# Altium PCB main_board.PcbDoc
Units mm, origin at the board's own origin, x right, y up, seen from the top; angles counter-clockwise.
Board outline 60 x 40 mm, 2 copper layers (Top Layer, Bottom Layer); 62 components, 50 nets, 234 pads, 46 vias.
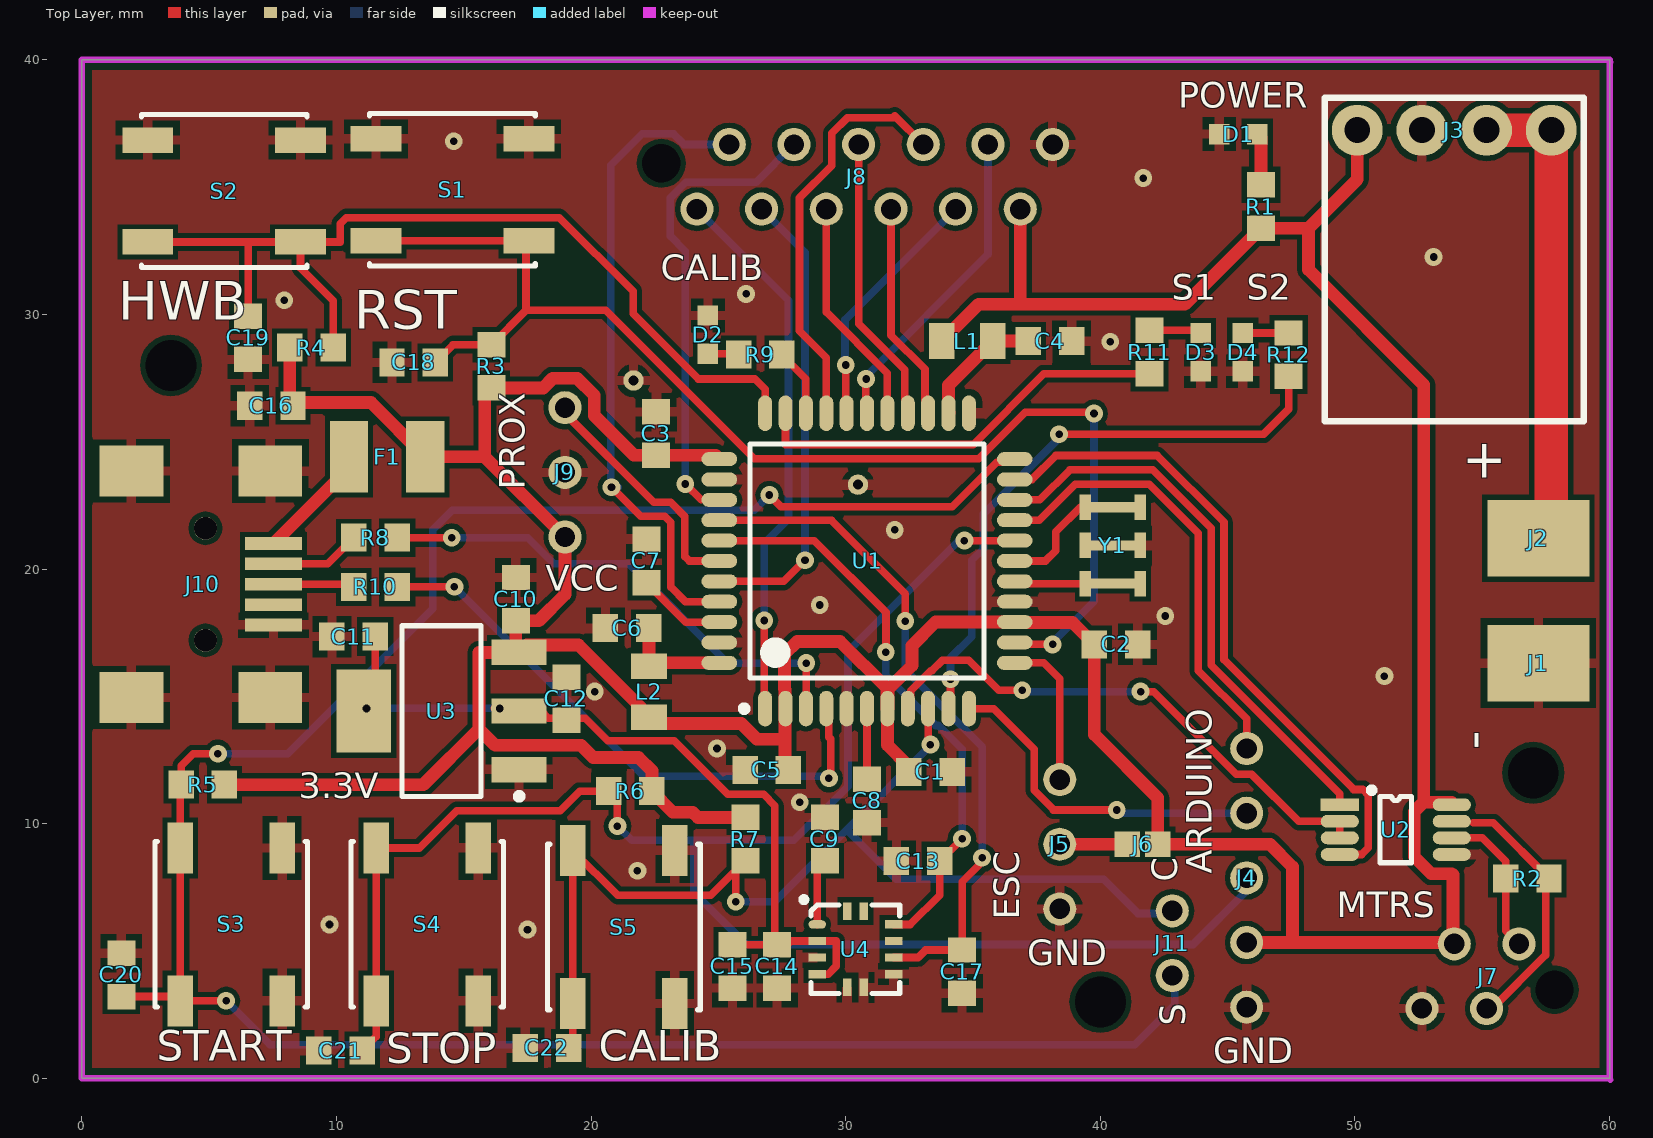
[diagram p0: Top Layer view]
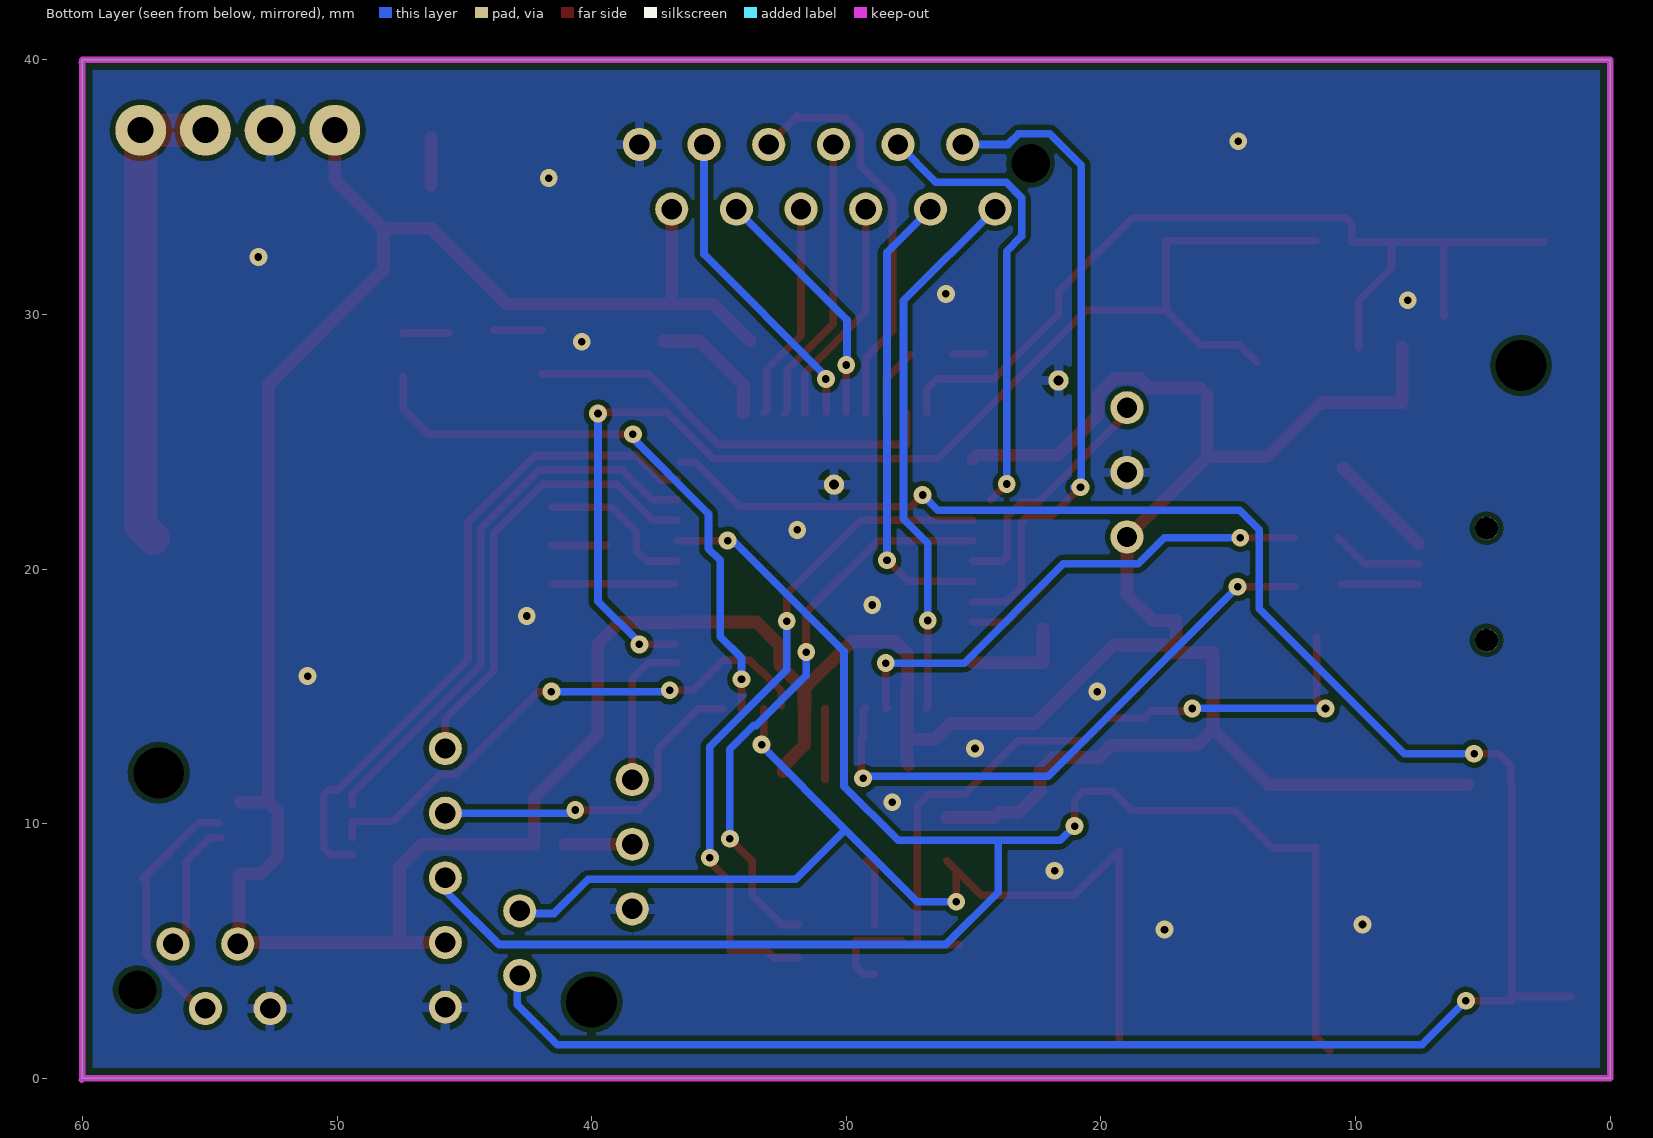
[diagram p1: Bottom Layer view, seen from below]
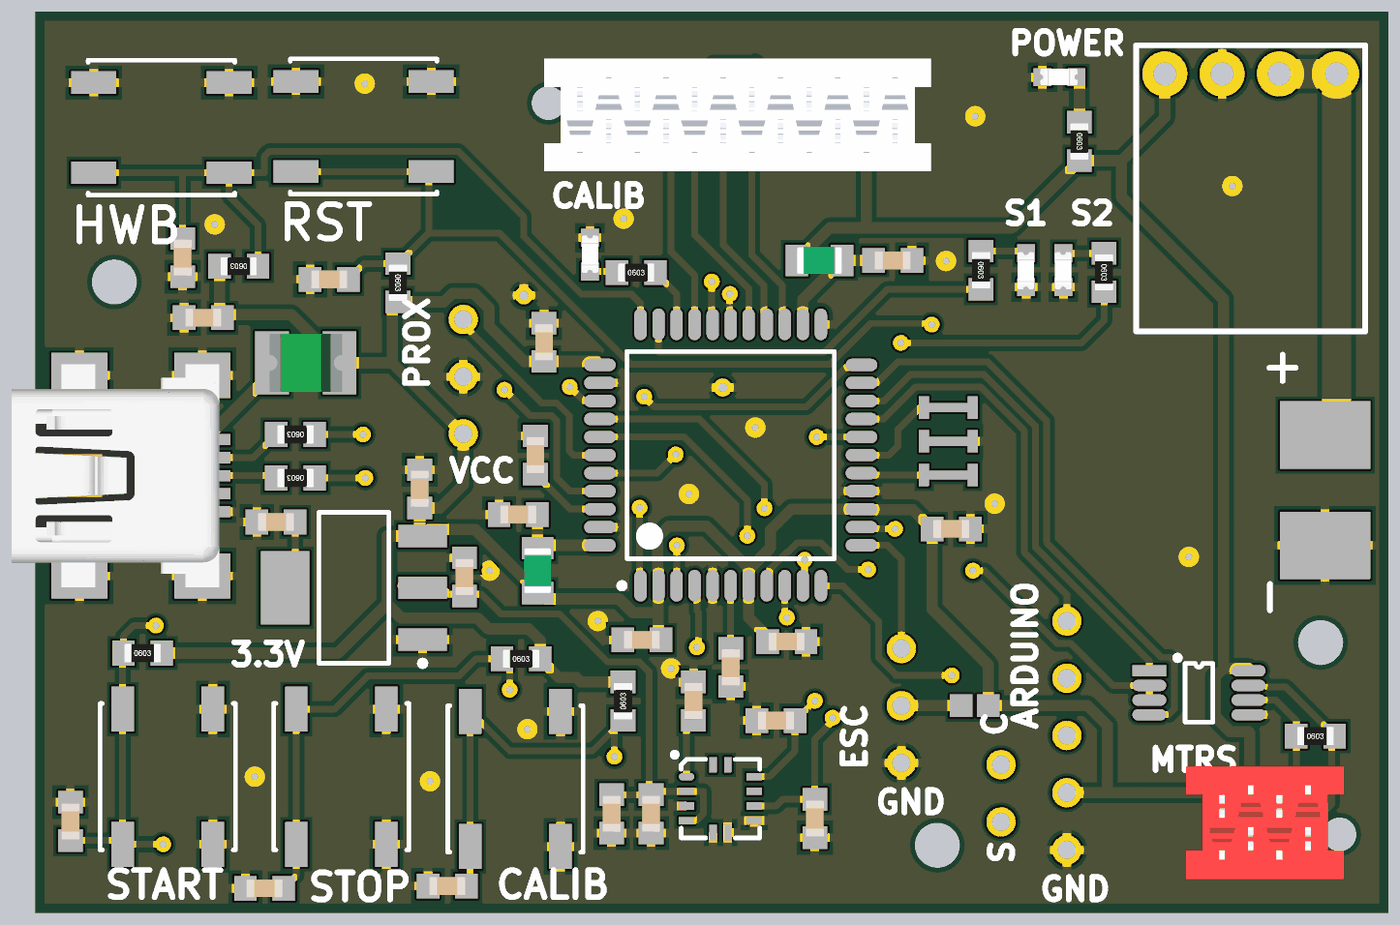
[diagram p2: 3D render of the assembled board from above, using the file's embedded part models]

## Layer stack, top to bottom
Top Solder: solder mask 0.0102, Solder Resist, Dk 3.5
Top Layer: signal copper 0.0356
Dielectric1: dielectric 0.32, FR-4, Dk 4.8
Bottom Layer: signal copper 0.0356
Bottom Solder: solder mask 0.0102, Solder Resist, Dk 3.5

## Board outline
0,0 0,40 60,40 60,0

## Design rules (kind name [scope] priority, off if disabled: settings)
AssemblyTestPointUsage SilkToBoardRegionClearance_1 [All] p2:
AssemblyTestPointUsage SilkToBoardRegionClearance_2 [All] p3:
BoardOutlineClearance "Board outline clearance" [InNet('GND')] p1: gap=0.4
Clearance [All] p1: gap=0.203
HoleSize [All] p1: absolutevalues=TRUE maxlimit=6.35 minlimit=0.3 maxpercent=80.000 minpercent=20.000
MatchedLengths DiffPair_DIFF100MatchedLengths [InDifferentialPairClass('DIFF100')] p1: tolerance=0.152 checknetsindiffpair=TRUE checkdiffpairvsdiffpair=FALSE checkxsignals=FALSE checkothers=FALSE
MinimumSolderMaskSliver [All] p1: minsoldermaskwidth=0.1
MinimumSolderMaskSliver SilkscreenOverComponentPads_2 [All] p2: minsoldermaskwidth=0.254
MinimumSolderMaskSliver SilkToSolderMaskClearance_1 [IsPad] p3: minsoldermaskwidth=0.254
MinimumSolderMaskSliver SilkscreenOverComponentPads_1 [All] p4: minsoldermaskwidth=0.254
MinimumSolderMaskSliver SilkToSolderMaskClearance [IsPad] p5: minsoldermaskwidth=0.254
MinimumSolderMaskSliver SilkscreenOverComponentPads [All] p6: minsoldermaskwidth=0.254
PolygonConnect via [isvia] p1: connectstyle=Direct reliefconductorwidth=0.254 reliefentries=4 polygonreliefangle="90 Angle" airgapwidth=0.254
PolygonConnect [All] p2: connectstyle=Relief reliefconductorwidth=0.381 reliefentries=4 polygonreliefangle="90 Angle" airgapwidth=0.254
RoutingVias [All] p1: holewidth=0.305 width=0.635 viastyle="Through Hole" minholewidth=0.305 minwidth=0.635 maxholewidth=0.711 maxwidth=1.27
SilkToSolderMaskClearance SilkToSolderMaskClearance_2 [IsPad] p1: minsilkscreentomaskgap=0.254 clearancetoexposedcopper=TRUE
SolderMaskExpansion [All] p1: expansion=0.102
Width [All] p1: maxlimit=2.54 minlimit=0.152 preferedwidth=0.254
27 further rules are at their usual default settings.

## Components (designator, comment, footprint, x,y, rotation, side; value= is the part's Value field where it differs from the comment)
C1 "100 nF *V" C0603 33.325,12.04 r180 top
C2 "100 nF *V" C0603 40.615,17.043 r180 top
C3 "100 nF *V" C0603 22.555,25.324 r270 top
C4 "100 nF *V" C0603 38.024,28.956 r180 top
C5 "100 nF *V" C0603 26.899,12.116 r180 top
C6 "100 nF *V" C0603 21.412,17.678 r0 top
C7 "100 nF *V" C0603 22.174,20.32 r90 top
C8 "1 uF *V" C0603 30.836,10.897 r270 top
C9 "100 nF *V" C0603 29.185,9.398 r90 top
C10 "100 nF *V" C0603 17.043,18.821 r270 top
C11 "100 nF *V" C0603 10.668,17.348 r180 top
C12 "100 nF *V" C0603 19.025,14.91 r90 top
C13 "9.1 nF *V" C0603 32.842,8.534 r180 top
C14 "4.7 uF *V" C0603 27.305,4.394 r90 top
C15 "100 nF *V" C0603 25.552,4.394 r90 top
C16 "100 nF *V" C0603 7.442,26.416 r0 top
C17 "9.1 nF *V" C0603 34.569,4.191 r270 top
C18 "100 nF *V" C0603 13.03,28.118 r180 top
C19 "100 nF *V" C0603 6.528,29.083 r270 top
C20 "100 nF *V" C0603 1.549,4.064 r90 top
C21 "100 nF *V" C0603 10.16,1.092 r180 top
C22 "100 nF *V" C0603 18.263,1.194 r180 top
D1 "LED" LED_0603 45.415,37.084 r180 top
D2 "LED" LED_0603 24.587,29.21 r90 top
D3 "LED" LED_0603 43.942,28.524 r270 top
D4 "LED" LED_0603 45.593,28.524 r270 top
F1 "#NAME?" F1210 11.989,24.409 r0 top
J1 "GND" POWER-PAD-4x3 57.201,16.307 r0 top
J2 "Vin" POWER-PAD-4x3 57.201,21.209 r0 top
J3 "Pololu 5V regu" "Pin Header 4" 53.899,37.236 r180 top
J4 "HEADER-5" PIN-HEADER-5 45.745,12.954 r270 top
J5 "HEADER-3" PIN-HEADER-3 38.405,11.735 r270 top
J6 "JUMPER" JUMPER-SMD-1010 41.656,9.195 r180 top
J7 "HEADER-4" MICRO-MATCH-4 56.439,5.283 r0 top
J8 "HEADER-12" MICRO-MATCH-12 24.155,34.138 r180 top
J9 "HEADER-3" PIN-HEADER-3 18.974,21.26 r90 top
J10 "USB-MINI-B" USB-B-MINI 4.851,19.406 r270 top
J11 "HEADER-2" PIN-HEADER-2 42.824,6.579 r270 top
L1 "Inductor" L0805 34.773,28.956 r0 top
L2 "Inductor" L0805 22.276,15.189 r90 top
R1 "330R" R0603 46.304,34.239 r270 top
R2 "120R" R0603 56.769,7.849 r0 top
R3 "10k" R0603 16.078,27.965 r270 top
R4 "10k" R0603 9.017,28.702 r180 top
R5 "10k" R0603 4.75,11.532 r0 top
R6 "10k" R0603 21.539,11.278 r0 top
R7 "10k" R0603 26.06,9.398 r90 top
R8 "22R" R0603 11.532,21.234 r180 top
R9 "330R" R0603 26.645,28.423 r0 top
R10 "22R" R0603 11.532,19.304 r180 top
R11 "330R" R0603 41.935,28.524 r270 top
R12 "330R" R0603 47.396,28.423 r270 top
S1 "EVQQ" EVQQ 14.554,34.9 r180 top
S2 "EVQQ" EVQQ 5.588,34.849 r180 top
S3 "EVQQ" EVQQ 5.867,6.045 r90 top
S4 "EVQQ" EVQQ 13.564,6.045 r90 top
S5 "EVQQ" EVQQ 21.285,5.944 r90 top
U1 "ATmega32U4-AU" TQFP-44_10X10 30.836,20.32 r90 top
U2 "RS-485" RS-485 49.403,10.744 r0 top
U3 "REG1117" SOT-223 14.122,14.427 r180 top
U4 "Accelerometer" Accel 28.88,6.045 r0 top
Y1 "Resonator" "Ceramic Resonator" 40.488,20.93 r270 top

## Footprints (in the part's own frame and the unit in brackets; to place one, negate y for a bottom-side part, rotate by r counter-clockwise, add the part's x,y. Pads: shape width x height; smd on the part's side, far side on the other; paste and mask are expansions set on the pad)
Accel [mm]
  oval 0.686x0.33 smd: 1(0,0)
  rect 0.686x0.33 smd: 2(0,-0.65) 3(0,-1.3) 4(0,-1.95) 7(3,-1.95) 8(3,-1.3) 9(3,-0.65) 10(3,0)
  rect 0.33x0.686 smd: 5(1.175,-2.475) 6(1.825,-2.475) 11(1.825,0.525) 12(1.175,0.525)
  silkscreen extent -0.61,-2.72 3.24,1.07
C0603 [mm] "0603 ceramic capacitor"
  rect 1x1.1 smd: 1(-0.85,0) 2(0.85,0)
  body extent -0.8,-0.4 0.8,0.4, height 0.8
"Ceramic Resonator" [mm]
  rect 1x0.45 smd: 0(0,1.075) 0(0,-1.075) 1(-1.5,1.075) 1(-1.5,-1.075) 2(1.5,1.075) 2(1.5,-1.075)
  rect 0.4x1.7 smd: 0(0,0) 1(-1.5,0) 2(1.5,0)
EVQQ [mm] "Switch, 2-Leads, Body 6,50x6,00mm, Panasonic EVQQ/EVQP"
  rect 2x1 smd: 1(-3,2) 1(3,2) 2(-3,-2) 2(3,-2)
  silkscreen extent -3.25,-3 3.25,3, body extent -3.25,-3 3.25,3, height 3
F1210 [mm]
  rect 1.5x2.8 smd: 1(-1.5,0) 2(1.5,0)
  body extent -1.61,-1.29 1.61,1.29, height 0.67
JUMPER-SMD-1010 [mm]
  rect 1x1 smd: 1(-0.6,0) 2(0.6,0)
L0805 [mm] "0805 inductor"
  rect 1x1.4 smd: 1(-1,0) 2(1,0)
  body extent -1,-0.6 1,0.6, height 0.94
LED_0603 [mm]
  rect 0.8x0.8 smd: 1(-0.75,0) 2(0.75,0)
  body extent -0.8,-0.38 0.85,0.35, height 0.68
MICRO-MATCH-4 [mm]
  round 1.3 hole 0.8: 1(0,0) 2(-1.27,-2.54) 3(-2.54,0) 4(-3.81,-2.54)
  round 0 hole 1.5 unplated: drill(1.4,-1.8)
  body extent -5.41,-3.77 1.6,1.23, height 4
MICRO-MATCH-12 [mm]
  round 1.3 hole 0.8: 1(0,0) 2(-1.27,-2.54) 3(-2.54,0) 4(-3.81,-2.54) 5(-5.08,0) 6(-6.35,-2.54) 7(-7.62,0) 8(-8.89,-2.54) 9(-10.16,0) 10(-11.43,-2.54) 11(-12.7,0) 12(-13.97,-2.54)
  round 0 hole 1.5 unplated: drill(1.4,-1.8)
  body extent -15.57,-3.77 1.6,1.23, height 4
"Pin Header 4" [mm] "4-pin pin header"
  round 2 hole 1.02: 1(-3.81,0) 2(-1.27,0) 3(1.27,0) 4(3.81,0)
  silkscreen extent -5.08,-1.27 5.08,11.43
PIN-HEADER-2 [mm]
  round 1.3 hole 0.8: 1(0,0) 2(2.54,0)
PIN-HEADER-3 [mm]
  round 1.3 hole 0.8: 1(0,0) 2(2.54,0) 3(5.08,0)
PIN-HEADER-5 [mm]
  round 1.3 hole 0.8: 1(0,0) 2(2.54,0) 3(5.08,0) 4(7.62,0) 5(10.16,0)
POWER-PAD-4x3 [mm]
  rect 4x3 smd: 1(0,0)
R0603 [mm] "0603 resistor"
  rect 1x1.1 smd: 1(-0.85,0) 2(0.85,0)
  body extent -0.8,-0.4 0.8,0.4, height 0.45
RS-485 [mm]
  rect 1.5x0.5 smd: 1(0,0)
  oval 1.5x0.5 smd: 2(0,-0.65) 3(0,-1.3) 4(0,-1.95) 5(4.4,-1.95) 6(4.4,-1.3) 7(4.4,-0.65) 8(4.4,0)
  silkscreen extent 1.15,-2.28 2.82,0.68
SOT-223 [mm] "SOT223, 4-Leads, Body 6,50x7,00mm (avg), Pitch 2,30mm"
  rect 2.15x1 smd: 1(-3.05,2.3) 2(-3.05,0) 3(-3.05,-2.3)
  rect 2.15x3.25 smd: 4(3.05,0)
  silkscreen extent -3.18,-3.35 1.55,3.47, body extent -1.85,-3.35 1.85,3.35, height 1.8
TQFP-44_10X10 [mm] "TQFP, 44-Leads, Body 10,00x10,00mm, Pitch 0,80mm"
  oval 1.4x0.55 smd: 1(-5.8,4) 2(-5.8,3.2) 3(-5.8,2.4) 4(-5.8,1.6) 5(-5.8,0.8) 6(-5.8,0) 7(-5.8,-0.8) 8(-5.8,-1.6) 9(-5.8,-2.4) 10(-5.8,-3.2) 11(-5.8,-4) 23(5.8,-4) 24(5.8,-3.2) 25(5.8,-2.4) 26(5.8,-1.6) 27(5.8,-0.8) 28(5.8,0) 29(5.8,0.8) 30(5.8,1.6) 31(5.8,2.4) 32(5.8,3.2) 33(5.8,4)
  oval 0.55x1.4 smd: 12(-4,-5.8) 13(-3.2,-5.8) 14(-2.4,-5.8) 15(-1.6,-5.8) 16(-0.8,-5.8) 17(0,-5.8) 18(0.8,-5.8) 19(1.6,-5.8) 20(2.4,-5.8) 21(3.2,-5.8) 22(4,-5.8) 34(4,5.8) 35(3.2,5.8) 36(2.4,5.8) 37(1.6,5.8) 38(0.8,5.8) 39(0,5.8) 40(-0.8,5.8) 41(-1.6,5.8) 42(-2.4,5.8) 43(-3.2,5.8) 44(-4,5.8)
  silkscreen extent -5.92,-4.6 4.6,4.95, body extent -5,-5 5,5, height 1.2
USB-B-MINI [mm]
  round 0.9 hole 0.9 unplated: 0(-2.2,0) 0(2.2,0)
  rect 0.5x2.25 smd: 1(-1.6,2.675) 2(-0.8,2.675) 3(0,2.675) 4(0.8,2.675) 5(1.6,2.675)
  rect 2x2.5 smd: 6(-4.45,2.55) 7(4.45,2.55) 8(4.45,-2.9) 9(-4.45,-2.9)
  body extent -4.95,-5.9 4.95,3.3, height 4.15

## Part data
C1 C2 C3 C4 C5 C6 C7 C8 C9 C10 C11 C12 C13 C14 C15 C16 C17 C18 C19 C20 C21 C22: library part Capacitor, "Ceramic capacitor"
D1 D2 D3 D4: "Light Emitting Diode"
F1: library part Fuse, "Fuse"
J1 J2: library part HEADER-1
J3: library part "Pin header 4"
J6: library part JUMPER-SMD
J10: library part USB-B-MINI
R1 R2 R3 R4 R5 R6 R7 R8 R9 R10 R11 R12: library part Resistor, "Resistor"
S1 S2 S3 S4 S5: "Switch"
U1: library part ATMEGA32U4-AU, "8-bit AVR Microcontroller, 2.7-5.5V, 32KB Flash, 2.5KB EEPROM, 1KB SRAM, USB Controller, 44-pin TQFP, Industrial Grade (-40°C to 85°C)"

## Free pads (board coordinates)
  round 1 hole 2 unplated: 15(3.5,28) 16(40,3) 17(57,12)
  round 0.8 hole 0.4: 20(21.666,27.407) 21(30.48,23.317)

## Via types
v1: diameter 0.7, hole 0.3, Top Layer to Bottom Layer, 42 vias
v2: diameter 0.7, hole 0.305, Top Layer to Bottom Layer, 4 vias

## Nets (pads, with @x,y where several pads share a name; then routed paths per layer and width w, separated by ;. In a path a pad name is that pad's centre, name@x,y a point inside that pad or via, vN(x,y) a via of type N, cw(c..) or ccw(c..) an arc to the next point about the centre after c; other vN are vias at no path point)
GND: C1.1 C2.1 C3.1 C4.1 C5.2 C6.1 C7.2 C8.2 C9.2 C10.1 C11.2 C12.2 C13.2 C14.1 C15.1 C16.1 C17.2 C18.2 C19.2 C20.2 C21.2 C22.2 D1.2 D2.2 D3.2 D4.2 J1.1 J3.3 J4.5 J5.3 J7.4 J8.12 J9.2 J10.5 J10.6 J10.7 J10.8 J10.9 pad.20 pad.21 S1.2 S2.2 S3.2 S4.2 S5.2 U1.5 U1.15 U1.23 U1.35 U1.43 U2.5 U3.1 U4.3 U4.5 U4.6 U4.7 Y1.0 | length 2.1
  Top Layer w0.3: Y1.0@39.413,20.93 Y1.0@41.563,20.93
  other v1: 17.501,5.842 9.728,6.045 21.819,8.153 28.194,10.846 24.943,12.954 20.142,15.189 51.156,15.799 42.545,18.161 28.981,18.593 31.928,21.539 40.386,28.931 7.95,30.556 26.086,30.81 53.086,32.258 41.681,35.357 14.605,36.805
NetC4_2: C4.2 L1.2 U1.24 | length 5
  Top Layer w0.5: U1.24@34.057,26.141 U1.24 34.036,27.219 L1.2 C4.2
NetC6_2: C6.2 L2.2 U1.44 | length 4.1
  Top Layer w0.5: C6.2@22.276,17.665 22.276,16.32 U1.44
NetC7_1: C7.1 U1.42 | length 3.5
  Top Layer w0.3: C7.1 23.724,17.92 U1.42
NetC8_1: C8.1 U1.6 | length 2.8
  Top Layer w0.3: C8.1 U1.6
NetC9_1: C9.1 U4.1 | length 2.6
  Top Layer w0.3: U4.1 28.88,8.243 C9.1
NetC11_1: C11.1 C12.1 C14.2 C15.2 U3.2 U3.4 U4.2 U4.4 | length 32.4
  Top Layer w0.3: v2(11.176,14.529) 11.176,14.531 11.518,14.873 C11.1 ; v2(16.408,14.529) 16.197,14.529 16.298,14.427 U3.2 18.034,14.427 18.313,14.148 19.761,14.148 20.65,13.259 23.259,13.259 25.366,11.152 26.778,11.152 27.217,10.713 27.217,5.244 C15.2 ; C14.2 27.698,5.244 27.849,5.395 U4.2 29.627,5.395 29.627,4.413 29.309,4.095 U4.4
  Bottom Layer w0.3: v2(11.176,14.529) v2(16.408,14.529)
NetC13_1: C13.1 U1.38 U4.10 | length 22.8
  Top Layer w0.3: U1.38 28.766,21.12 31.58,18.305 31.58,16.747 v1(31.572,16.739) ; U4.10 32.537,6.045 33.692,7.2 C13.1 v1(34.569,9.412)
  Bottom Layer w0.3: v1(31.572,16.739) 31.572,15.824 33.536,13.86 33.637,13.86 34.569,12.928 v1(34.569,9.412)
NetC17_1: C17.1 U1.37 U4.8 | length 26.9
  Top Layer w0.3: U1.37 29.439,21.92 32.334,19.025 v1(32.334,17.958) ; U4.8 32.838,4.745 33.133,5.041 C17.1 34.569,7.722 35.433,8.585 v1(35.357,8.661)
  Bottom Layer w0.3: v1(32.334,17.958) 32.334,16.053 35.357,13.03 v1(35.357,8.661)
NetC18_1: C18.1 R3.1 S1.1 U1.13 | length 49.6
  Top Layer w0.3: S1.1@11.554,32.9 S1.1@17.453,32.9 ; C18.1 14.578,28.815 R3.1 16.09,28.815 17.443,30.169 ; S1.1@17.443,32.789 17.443,30.169 ; U1.13@36.712,17.043 v1(38.125,17.043) ; v1(39.751,26.111) 39.751,26.162 37.055,26.162 35.23,24.338 26.403,24.338 20.572,30.169 17.443,30.169
  Bottom Layer w0.3: v1(38.125,17.043) 38.125,17.12 39.751,18.745 v1(39.751,26.111)
NetC19_1: C19.1 R4.1 S2.1 U1.33 | length 39
  Top Layer w0.3: S2.1@2.588,32.849 S2.1@8.588,32.849 ; C19.1 6.528,32.823 6.553,32.849 S2.1@8.588,32.849 ; R4.1 9.867,30.544 8.588,31.823 S2.1@8.588,32.849 ; U1.33 26.836,27.063 26.43,27.469 24.207,27.469 21.648,30.028 21.648,30.904 18.749,33.804 10.387,33.804 10.15,33.567 10.15,32.849 S2.1@8.588,32.849
NetC20_1: C20.1 J11.2 R5.1 S3.1 U1.22 | length 92.4
  Top Layer w0.3: C20.1 S3.1@3.699,3.214 ; S3.1@3.867,3.045 v2(5.667,3.045) ; S3.1@3.867,3.214 3.867,9.045 3.867,11.499 R5.1 3.9,12.282 4.369,12.751 v1(5.341,12.751) ; v1(27,22.911) 27.457,22.454 34.184,22.454 35.929,24.199 U1.22@36.515,24.199
  Bottom Layer w0.3: v1(5.341,12.751) 8.077,12.751 13.775,18.448 13.775,21.547 14.542,22.314 26.403,22.314 v1(27,22.911) ; v2(5.667,3.045) 7.391,1.321 41.351,1.321 42.926,2.896 J11.2@42.926,3.937
NetC21_1: C21.1 J4.3 R6.1 S4.1 U1.18 | length 69.6
  Top Layer w0.3: C21.1 11.564,1.646 11.564,3.045 11.564,9.045 13.256,9.045 14.726,10.516 18.786,10.516 19.548,11.278 R6.1 21.031,10.936 v1(21.031,9.906) ; v1(34.658,21.12) U1.18
  Bottom Layer w0.3: v1(21.031,9.906) 21.59,9.347 24.028,9.347 ; v1(34.658,21.12) 34.43,21.12 30.091,16.781 30.091,11.473 27.965,9.347 24.028,9.347 ; J4.3 45.745,7.365 43.638,5.258 26.086,5.258 24.028,7.315 24.028,9.347
NetC22_1: C22.1 J11.1 R7.1 S5.1 U1.9 | length 42.8
  Top Layer w0.3: C22.1@19.285,1.366 19.285,2.944 19.285,8.944 21.041,7.188 24.701,7.188 R7.1@25.679,8.167 ; v1(25.679,6.934) R7.1@25.679,8.167 ; R7.1 R7.1@25.679,8.167 ; U1.9 33.236,13.196 v1(33.325,13.106)
  Bottom Layer w0.3: v1(25.679,6.934) 27.203,6.934 30.035,9.766 ; v1(33.325,13.106) 33.325,13.056 30.035,9.766 ; J11.1@42.926,6.477 41.478,6.477 40.132,7.823 31.979,7.823 30.035,9.766
NetD1_1: D1.1 R1.1 | length 1.9
  Top Layer w0.5: R1.1 D1.1@46.304,36.945
NetD2_1: D2.1 R9.1 | length 1.2
  Top Layer w0.3: D2.1 25.757,28.46 R9.1
NetD3_1: D3.1 R11.1 | length 1.9
  Top Layer w0.3: R11.1 D3.1@43.842,29.374
NetD4_1: D4.1 R12.1 | length 1.8
  Top Layer w0.3: D4.1 45.595,29.273 R12.1
NetF1_1: F1.1 J10.1 | length 4.2
  Top Layer w0.5: J10.1 F1.1@10.489,23.968
NetJ2_1: J2.1 J3.1 J3.2 | length 18.8
  Top Layer w1.3: J3.2 J3.1 57.709,21.717 J2.1
NetJ4_1: J4.1 U1.19 | length 17.8
  Top Layer w0.3: U1.19 37.607,21.92 39.02,23.334 41.918,23.334 43.85,21.402 43.85,16.017 45.745,14.122 J4.1
NetJ4_2: J4.2 U1.11 | length 13.6
  Top Layer w0.3: U1.11 35.813,14.52 37.402,12.931 37.402,11.319 38.151,10.57 38.151,10.541 v2(40.64,10.541)
  Bottom Layer w0.3: v2(40.64,10.541) 40.767,10.414 J4.2
NetJ5_1: J5.1 U1.12 | length 6
  Top Layer w0.3: U1.12 37.782,16.32 38.405,15.697 J5.1
NetJ5_2: J5.2 J6.2 | length 2.7
  Top Layer w0.5: J5.2 J6.2
NetJ7_1: J7.1 R2.1 U2.6 | length 5.2
  Top Layer w0.3: 54.578,9.444 54.996,9.444 55.919,8.521 R2.1 55.919,5.803 J7.1
NetJ7_2: J7.2 R2.2 U2.7 | length 10.1
  Top Layer w0.3: 54.639,10.033 55.435,10.033 R2.2 57.493,7.722 57.493,4.847 55.389,2.743 J7.2
NetJ8_1: J8.1 U1.1 | length 21.5
  Top Layer w0.3: v1(26.797,17.983) 26.797,14.583 U1.1@26.848,14.532
  Bottom Layer w0.3: J8.1 27.754,30.539 27.754,21.975 26.797,21.018 v1(26.797,17.983)
NetJ8_2: J8.2 U1.41 | length 25.9
  Top Layer w0.3: v1(20.803,23.216) 21.944,22.074 22.892,22.074 23.128,21.837 23.128,19.299 23.708,18.72 U1.41
  Bottom Layer w0.3: v1(20.803,23.216) 21.057,23.216 20.777,23.495 20.777,35.865 22.004,37.092 23.233,37.092 23.647,36.678 J8.2
NetJ8_3: J8.3 U1.40 | length 18.2
  Top Layer w0.3: U1.40 27.572,19.52 v1(28.397,20.345)
  Bottom Layer w0.3: J8.3 28.397,32.436 v1(28.397,20.345)
NetJ8_4: J8.4 U1.36 | length 18.1
  Top Layer w0.3: v1(23.698,23.343) 24.321,22.72
  Bottom Layer w0.3: v1(23.698,23.343) 23.698,32.487 23.101,33.084 23.101,34.574 23.719,35.192 26.479,35.192 J8.4
NetJ8_5: J8.5 U1.27 | length 9
  Top Layer w0.3: J8.5 29.235,30.099 31.636,27.699 U1.27
NetJ8_6: J8.6 U1.26 | length 11.4
  Top Layer w0.3: J8.6 30.505,29.642 32.315,27.833 32.315,26.241 U1.26
NetJ8_7: J8.7 U1.25 | length 8.6
  Top Layer w0.3: J8.7 31.775,29.182 33.115,27.843 33.115,26.241 U1.25
NetJ8_8: J8.8 U1.30 | length 16.3
  Top Layer w0.3: U1.30 29.236,28.303 28.181,29.357 28.181,34.574 29.451,35.844 29.451,37.114 30.069,37.732 31.864,37.732 31.928,37.795 J8.8
NetJ8_9: J8.9 U1.29 | length 9.8
  Top Layer w0.3: U1.29@29.997,26.158 v1(29.997,28.016)
  Bottom Layer w0.3: v1(29.997,28.016) 29.972,28.042 29.972,29.794 J8.9
NetJ8_10: J8.10 U1.28 | length 12.5
  Top Layer w0.3: U1.28@30.785,26.17 30.785,27.483 v1(30.799,27.469)
  Bottom Layer w0.3: v1(30.799,27.469) 30.799,27.573 35.585,32.36 J8.10
NetJ9_3: J9.3 U1.39 | length 9.6
  Top Layer w0.3: J9.3 18.974,26.111 22.457,22.628 23.121,22.628 23.682,22.067 23.682,20.498 23.86,20.32 U1.39
NetJ10_2: J10.2 R8.2 | length 3.6
  Top Layer w0.3: J10.2 9.653,20.206 R8.2
NetJ10_3: J10.3 R10.2 | length 3.1
  Top Layer w0.3: J10.3 R10.2@10.58,19.406
NetR8_1: R8.1 U1.3 | length 19.9
  Top Layer w0.3: R8.1 v1(14.529,21.234) ; U1.3 28.397,14.558 28.448,14.609 v1(28.448,16.307)
  Bottom Layer w0.3: v1(14.529,21.234) 17.509,21.234 18.537,20.206 21.471,20.206 25.37,16.307 v1(28.448,16.307)
NetR9_2: R9.2 U1.31 | length 2.7
  Top Layer w0.3: R9.2 28.436,27.482 U1.31
NetR10_1: R10.1 U1.4 | length 23
  Top Layer w0.3: R10.1 v1(14.63,19.304) ; U1.4 29.261,14.545 29.337,14.469 29.337,13.406 29.405,13.338 29.405,11.854 v1(29.337,11.786)
  Bottom Layer w0.3: v1(14.63,19.304) 22.073,11.862 29.261,11.862 v1(29.337,11.786)
NetR11_2: R11.2 U1.32 | length 16.7
  Top Layer w0.3: U1.32 27.636,24.892 35.001,24.892 37.783,27.674 R11.2
NetR12_2: R12.2 U1.10 | length 23.5
  Top Layer w0.3: U1.10@34.112,14.52 v1(34.112,15.672) ; v1(38.379,25.298) 46.406,25.298 47.396,26.289 R12.2
  Bottom Layer w0.3: v1(34.112,15.672) 34.112,16.51 34.95,17.348 34.95,20.346 35.412,20.808 35.412,22.179 38.532,25.298 v1(38.379,25.298)
NetU1_8: U1.8 U2.2 U2.3 | length 21.2
  Top Layer w0.3: U1.8@32.557,14.641 32.557,15.226 33.342,16.011 33.385,16.011 33.8,16.426 34.831,16.426 36.017,15.24 v1(36.932,15.24) ; v1(41.58,15.189) 42.091,15.189 45.33,11.951 45.936,11.951 47.792,10.094 U2.2 U2.3
  Bottom Layer w0.3: v1@36.932,15.189 v1(41.58,15.189)
NetU1_16: U1.16 Y1.2 | length 4.8
  Top Layer w0.3: U1.16@36.726,19.43 40.488,19.43 Y1.2@41.563,19.43
NetU1_17: U1.17 Y1.1 | length 6.2
  Top Layer w0.3: U1.17 37.846,20.32 38.252,20.726 38.252,21.463 39.219,22.43 39.413,22.43 40.488,22.43 Y1.1@41.563,22.43
NetU1_20: U1.20 U2.1 | length 22.1
  Top Layer w0.3: U1.20 37.623,22.72 38.809,23.906 42.057,23.906 44.353,21.61 44.353,16.225 49.403,11.176 U2.1
NetU1_21: U1.21 U2.4 | length 26.3
  Top Layer w0.3: U1.21 37.312,23.52 38.252,24.46 42.24,24.46 44.856,21.844 44.856,16.434 49.943,11.347 50.299,11.347 50.521,11.126 50.521,9.054 50.261,8.794 U2.4
VCC: C1.2 C2.2 C3.2 C5.1 C10.2 C16.2 F1.2 J3.4 J4.4 J6.1 J7.3 J8.11 J9.1 L1.1 L2.1 R1.2 R3.2 R4.2 R5.2 R6.2 R7.2 U1.2 U1.7 U1.14 U1.34 U2.8 U3.3 | length 180.7
  Top Layer w0.5: R5.2 13.407,11.532 15.593,13.718 ; R4.2 8.167,26.541 11.357,26.541 F1.2 15.824,24.409 ; R3.2@15.824,26.861 15.824,24.409 ; R3.2 18.117,27.115 18.496,27.494 19.452,27.494 20.128,26.818 20.128,26.026 21.68,24.474 C3.2 24.882,24.474 U1.34 ; U3.3@17.043,16.727 C10.2 17.946,17.971 18.974,18.999 J9.1 15.824,24.409 ; R7.2 24.194,10.248 23.994,10.448 23.219,10.448 R6.2 22.389,12.079 21.863,12.605 20.084,12.605 19.608,13.08 16.231,13.08 15.593,13.718 ; 27.507,13.316 26.513,13.316 25.894,13.935 22.59,13.935 19.507,17.018 17.463,17.018 U3.3 15.593,16.727 15.593,13.718 ; C5.1@27.545,12.294 27.615,12.363 27.615,14.499 U1.2@27.625,14.509 ; U1.2@27.615,14.52 27.615,15.268 27.594,15.288 27.594,16.661 28.094,17.161 29.778,17.161 31.615,15.325 31.615,14.52 U1.7 ; C1.2 32.475,12.255 31.636,13.094 U1.7 ; L1.1 35.22,30.404 43.319,30.404 R1.2 48.172,33.389 ; U1.14 33.531,17.92 32.603,16.992 32.603,16.214 31.657,15.268 31.657,14.541 U1.7 ; U1.14@36.657,17.899 38.909,17.899 C2.2 39.765,13.499 42.256,11.008 J6.1 46.66,9.195 47.549,8.306 47.549,5.334 ; 36.855,30.455 J8.11 ; J4.4@45.491,5.334 47.549,5.334 ; J3.4 50.089,35.306 48.172,33.389 ; U2.8@53.803,10.848 52.7,10.848 ; 47.549,5.334 53.848,5.334 53.848,7.995 53.803,8.04 52.991,8.04 52.324,8.707 52.324,10.472 52.7,10.848 ; 48.172,33.389 48.172,31.762 52.7,27.234 52.7,10.848
pads on no net: J7.drill J8.drill J10.0 J10.4 U4.9 U4.11 U4.12

## Polygon pours and split planes (outlines as drawn)
GND on Bottom Layer "BOTTOM_GND" (solid, remove dead copper, pour order 6): 0,40 60,40 60,0 0,0
GND on Top Layer "TOP_GND" (solid, remove dead copper, pour order 8): 0,40 0,0 60,0 60,40

## Keep-outs
Keep-Out Layer:
  lines w0.254: 59.944,39.98 60.02,39.903 ; 59.969,0 60.02,-0.051 ; 0,0 0,40 60,40 60,0 0,0

## Silkscreen, mask and mechanical layers (free items; w line width, h text height)
Top Overlay:
  text "POWER" at 43.053,38.125 h1
  text "CALIB" at 22.733,31.344 h1
  text "S1" at 42.799,30.582 h1
  text "S2" at 45.745,30.582 h1
  text "HWB" at 1.422,29.794 h1.52
  text "RST" at 10.693,29.439 h1.52
  text "+" at 54.204,23.597 h1.52
  text "PROX" at 17.399,23.114 h1 r90
  text "VCC" at 18.212,19.152 h1
  text "-" at 55.347,12.903 h1.52 r90
  text "3.3V" at 8.509,10.998 h1
  text "ARDUINO" at 44.374,8.026 h1 r90
  text "C" at 43.028,7.722 h1 r90
  text "MTRS" at 49.276,6.325 h1
  text "ESC" at 36.805,6.223 h1 r90
  text "GND" at 37.135,4.445 h1
  text "S" at 43.332,2.057 h1 r90
  text "START" at 2.946,0.686 h1.2
  text "CALIB" at 20.295,0.686 h1.2
  text "STOP" at 11.963,0.584 h1.2
  text "GND" at 44.425,0.584 h1
Mechanical 16:
  drawing of 1874 lines, arcs and shapes, not listed
  text "1" at -29.286,135.509 h1.78
  text "2" at 43.358,135.509 h1.78
  text "3" at 116.51,135.509 h1.78
  text "4" at 189.408,135.509 h1.78
  text "A" at -63.627,112.497 h1.78
  text "A" at 223.393,112.497 h1.78
  text "B" at -63.627,64.44 h1.78
  text "B" at 223.393,64.44 h1.78
  text "C" at -63.627,15.926 h1.78
  text "ENGINEER:" at 108.458,-21.082 h1.14
  text "TITLE:" at 146.558,-21.082 h1.14
  text "PCB DESIGNER:" at 108.458,-28.575 h1.14
  text "D" at -63.627,-32.08 h1.78
  text "D" at 223.393,-32.08 h1.78
  text "DATE:" at 108.458,-36.322 h1.14
  text "PART NO.:" at 146.558,-36.322 h1.14
  text "REV:" at 199.898,-36.322 h1.14
  text "Altium Limited" at 75.438,-38.862 h1.78
  text ".PRINT_DATE" at 109.728,-39.37 h1.78
  text "12a Rodborough Rd" at 75.438,-41.402 h1.78
  text "Frenchs Forest" at 75.438,-43.942 h1.78
  text "FILE NAME:" at 108.458,-43.942 h1.14
  text "DWG NO:" at 146.558,-43.942 h1.14
  text "SCALE:" at 199.898,-43.942 h1.14
  text "NSW 2086" at 75.438,-46.482 h1.78
  text ".PCB_FILE_NAME_NO_PATH" at 109.728,-46.99 h1.78
  text "1" at -29.286,-52.451 h1.78
  text "2" at 43.358,-52.451 h1.78
  text "3" at 116.51,-52.451 h1.78
  text "4" at 189.408,-52.451 h1.78